# Altium PCB pcb.pcbdoc
Units mil, origin at the board's own origin, x right, y up, seen from the top; angles counter-clockwise.
Board outline 3897.6 x 2795.3 mil, 2 copper layers (Top Layer, Bottom Layer), stack 65.792 mil thick; 61 components, 75 nets, 253 pads, 287 vias.
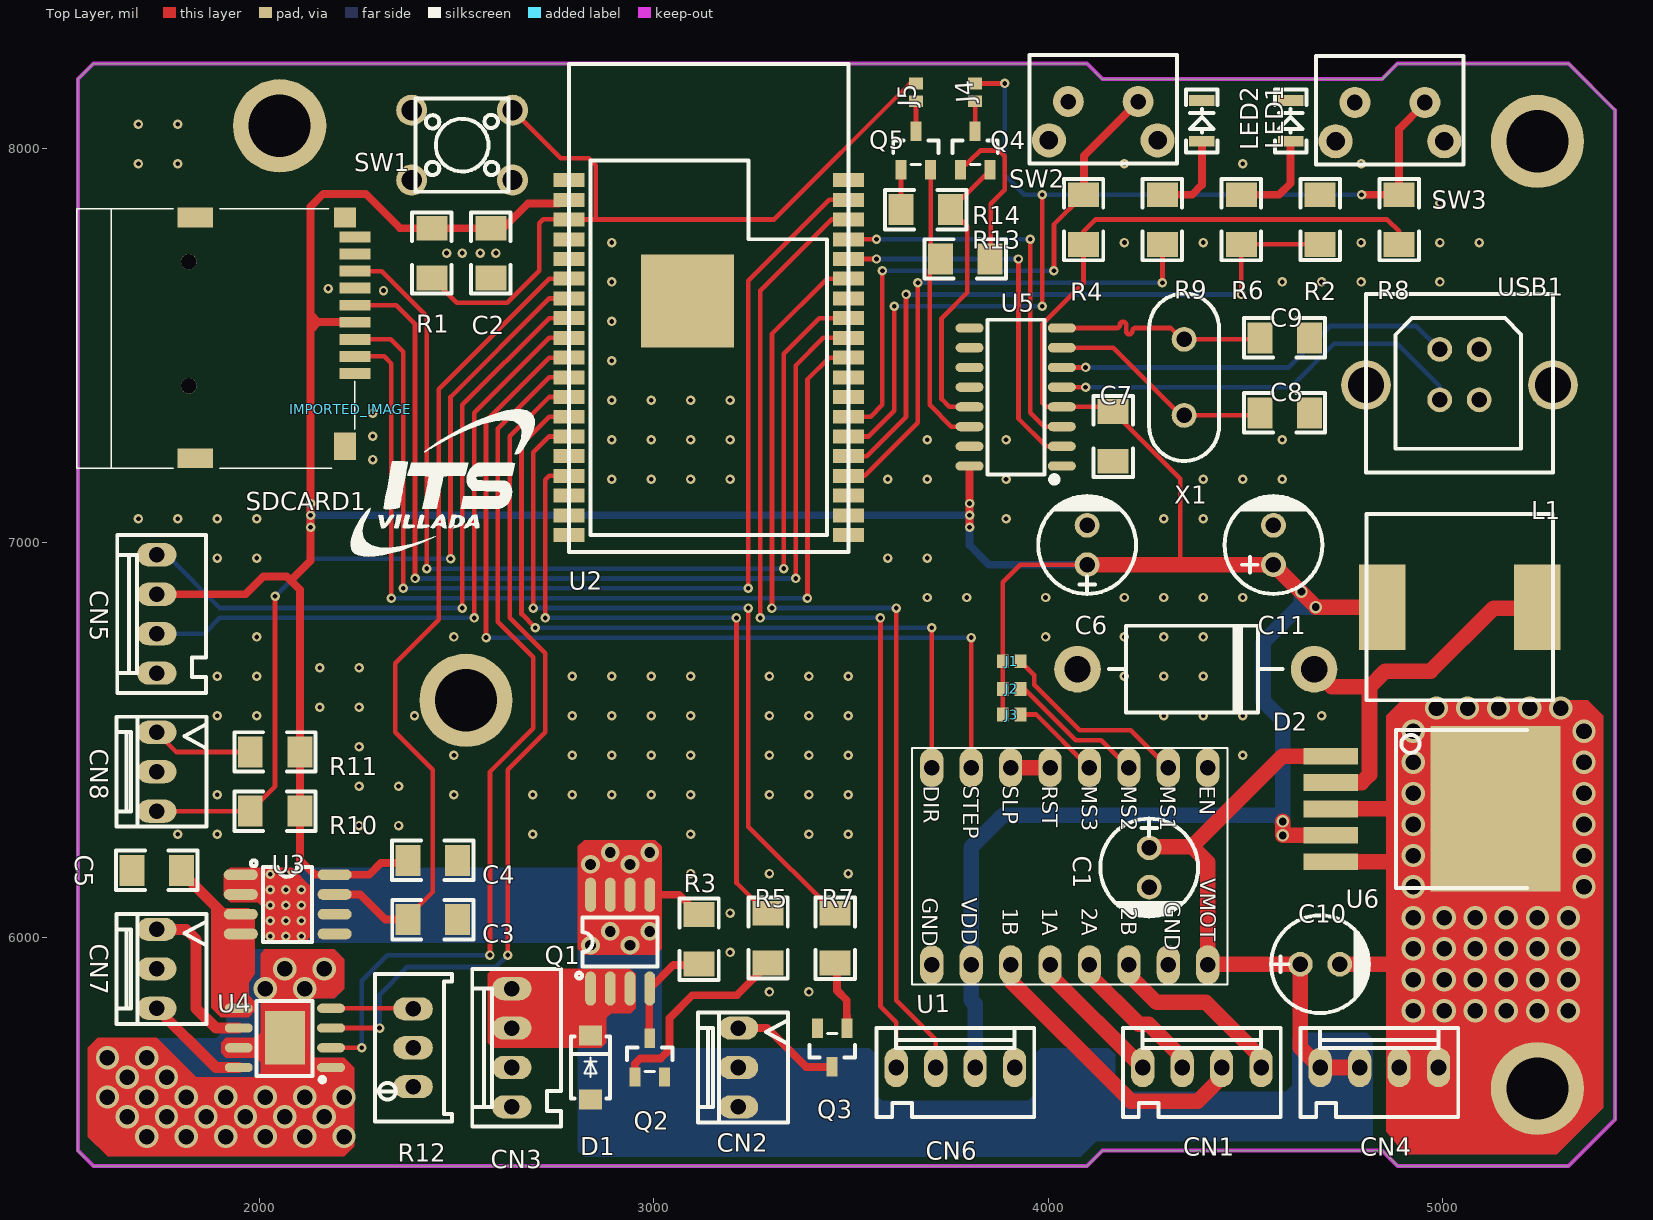
[diagram p0: Top Layer view]
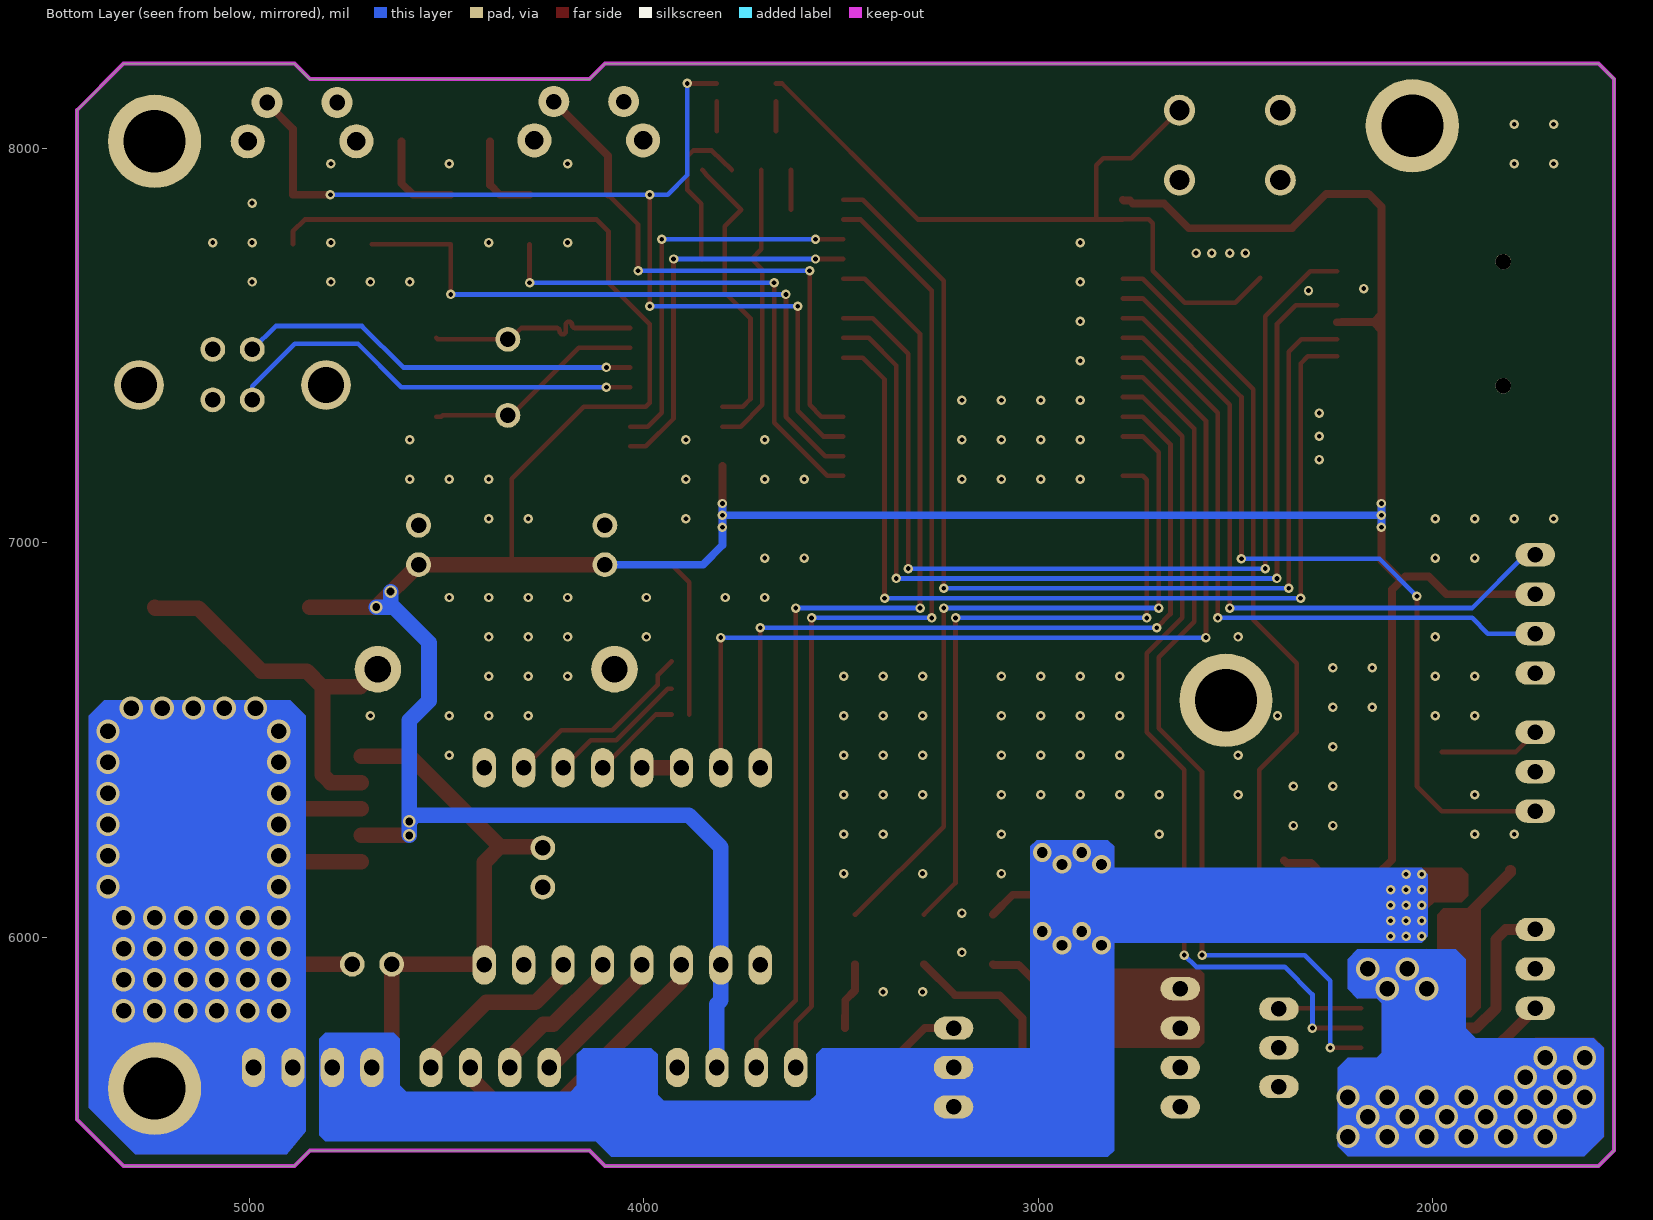
[diagram p1: Bottom Layer view, seen from below]

## Layer stack, top to bottom
Top Solder: solder mask 0.4, Solder Resist, Dk 3.5
Top Layer: signal copper 1.4
Dielectric1: dielectric 62.9921, FR-4, Dk 4.8
Bottom Layer: signal copper 1.4
Bottom Solder: solder mask 0.4, Solder Resist, Dk 3.5

## Board outline
1578.74,5419.13 1539.37,5458.5 1539.37,8175.03 1578.77,8214.43 4098.47,8214.43 4137.77,8175.03 4846.47,8175.03 4885.87,8214.43 5318.87,8214.43 5436.97,8096.33 5436.97,5537.23 5318.87,5419.13 4885.87,5419.13 4846.47,5458.53 4137.77,5458.53 4098.47,5419.13

## Design rules (kind name [scope] priority, off if disabled: settings)
Clearance [All] p1: gap=10 ignorepadtopadclearanceinfootprint=FALSE except(0: Arc-Hole Track-Hole SMDPad-Hole THPad-Hole Via-Hole Fill-Hole Poly-Hole Region-Hole Text-Hole)
PolygonConnect [All] p1: connectstyle=Relief reliefconductorwidth=10 reliefentries=4 polygonreliefangle="90 Angle" airgapwidth=10
RoutingVias [All] p1: holewidth=28 width=50 viastyle="Through Hole" minholewidth=28 minwidth=50 maxholewidth=28 maxwidth=50
SolderMaskExpansion [All] p1: expansion=4
Width [All] p1: maxlimit=10 minlimit=10 preferedwidth=10
30 further rules are at their usual default settings.

## Components (designator, comment, footprint, x,y, rotation, side; value= is the part's Value field where it differs from the comment)
C1 "100uF" CAP-D6.3XF2.5 4255.87,6176.23 r270 top
C2 "100nF" 1206 2586.67,7734.13 r90 top
C3 "1nF" 1206 2439.37,6044.13 r0 top
C4 "100nF" 1206 2439.37,6194.13 r180 top
C5 "100nF" 1206 1739.37,6169.13 r0 top
C6 "100uF" CAP-D6.3XF2.5 4098.47,6993.93 r90 top
C7 "100nF" 1206 4164.37,7269.13 r90 top
C8 "22pF" 1206 4599.37,7329.13 r180 top
C9 "22pF" 1206 4599.37,7519.13 r180 top
C10 "100uF" CAP-D6.3XF2.5 4688.97,5930.93 r0 top
C11 "470uF" CAP-TH_BD6.3-P2.50-D1.0-L-FD 4570.87,6993.93 r90 top
CN1 "A2543WV-4P" PH-4P-2.54 4389.37,5669.13 r0 top
CN2 "22041031" 22041031 3214.37,5669.13 r90 top
CN3 "A2543WV-4P" PH-4P-2.54 2639.37,5719.13 r90 top
CN4 "A2543WV-4P" PH-4P-2.54 4839.37,5669.13 r0 top
CN5 "A2543WV-4P" PH-4P-2.54 1739.37,6819.13 r90 top
CN6 "A2543WV-4P" PH-4P-2.54 3764.37,5669.13 r0 top
CN7 "22041031" 22041031 1739.37,5919.13 r90 top
CN8 "22041031" 22041031 1739.37,6419.13 r90 top
D1 "M7_C95872" DO-214AC_2PIN-L5.66-W2.80-R 2839.37,5669.13 r270 top
D2 "1N5820G" DO-201AD 4374.02,6678.98 r270 top
IMPORTED_IMAGE "Comment" IMPORTED_IMAGE 2230.83,7338.43 r0 top
J1 "jumper_smd" JMP 3929.37,6699.13 r180 top
J2 "jumper_smd" JMP 3929.37,6629.13 r180 top
J3 "jumper_smd" JMP 3929.37,6564.13 r180 top
J4 "jumper_smd" JMP 3814.37,8119.13 r90 top
J5 "jumper_smd" JMP 3664.37,8119.13 r90 top
L1 "150uH" L-SMD-12X12X8MM 5043.31,6836.46 r180 top
LED1 "TJ-S3216SW9TGLC2R-A5" LED-1206 4614.37,8069.13 r90 top
LED2 "TJ-S3216SW9TGLC2R-A5" LED-1206 4389.37,8069.13 r90 top
Q1 "IRF7416TRPBF" SOIC-8_150MIL#1 2914.37,5988.13 r90 top
Q2 "S9014" SOT-23(SOT-23-3) 2989.37,5694.13 r0 top
Q3 "S8050" SOT-23(SOT-23-3) 3451.97,5719.93 r180 top
Q4 "S9014" SOT-23(SOT-23-3) 3814.37,7994.13 r0 top
Q5 "S9014" SOT-23(SOT-23-3) 3664.37,7994.13 r0 top
R1 "10K" 1206 2436.97,7734.13 r90 top
R2 "10K" 1206 4689.37,7819.13 r90 top
R3 "10K" 1206 3114.37,5994.13 r90 top
R4 "10K" 1206 4089.37,7819.13 r270 top
R5 "1K" 1206 3289.37,5997.12 r90 top
R6 "330" 1206 4489.37,7819.13 r270 top
R7 "1K" 1206 3459.37,5997.12 r270 top
R8 "10K" 1206 4889.37,7819.13 r270 top
R9 "330" 1206 4289.37,7819.13 r270 top
R10 "10K" 1206 2039.37,6319.13 r0 top
R11 "1K" 1206 2039.37,6469.13 r0 top
R12 "50K" RES-ADJ-TH_3PIN-V-L9.50-W4.85-PITCH2.50 2389.37,5719.14 r180 top
R13 "10K" 1206 3789.37,7719.13 r0 top
R14 "10K" 1206 3689.37,7844.13 r180 top
SDCARD1 "TF-01A" TF-01A 2039.37,7519.1 r270 top
SW1 "TSA061G90-250" KEY-TOUCH-DIP-6.0*6.0*H 2513.77,8007.73 r0 top
SW2 "PTS645VL39-2LFS" KEY-7.0*7.0 4139.37,8069.13 r0 top
SW3 "PTS645VL39-2LFS" KEY-7.0*7.0 4866.17,8066.73 r0 top
U1 "A4988" "A4988 DRIVER MOTOR" 4404.37,6429.13 r270 top
U2 "ESP32-WROVER" ESP32-WROVER 3139.37,7469.13 r0 top
U3 "ACS722LLCTR-05AB-T" SOIC-8_150MIL#2 1977.57,6157.83 r0 top
U4 "DRV8871DDAR" SO-8_EP 2064.37,5744.13 r180 top
U5 "CH340G" SOIC-16_150MIL 3917.37,7369.13 r90 top
U6 "LM2576SX-3.3/NOPB" TO-263-5 4925.17,6324.63 r180 top
USB1 "USB-BType interface female 180°" USB-B-1 5042.51,7425.98 r180 top
X1 "12MHz" OSC-49S-1 4344.37,7419.13 r0 top

## Footprints (in the part's own frame and the unit in brackets; to place one, negate y for a bottom-side part, rotate by r counter-clockwise, add the part's x,y. Pads: shape width x height; smd on the part's side, far side on the other; paste and mask are expansions set on the pad)
1206 [mil]
  rect 63x78.74 smd: 1(-62.99,0) 2(62.99,0)
  silkscreen extent -103,-50 103,50
22041031 [mm]
  oval 1.5x2.54 hole 1: 1(2.54,0) 2(0,0) 3(-2.54,0)
  silkscreen extent -3.54,-3.2 3.54,2.6
"A4988 DRIVER MOTOR" [mm]
  oval 2.54x1.5 hole 1: 1(0,0) 2(0,-2.54) 3(0,-5.08) 4(0,-7.62) 5(0,-10.16) 6(0,-12.7) 7(0,-15.24) 8(0,-17.78) 9(12.7,-17.78) 10(12.7,-15.24) 11(12.7,-12.7) 12(12.7,-10.16) 13(12.7,-7.62) 14(12.7,-5.08) 15(12.7,-2.54) 16(12.7,0)
  silkscreen extent -1.27,-19.05 13.97,1.27
CAP-D6.3XF2.5 [mm]
  round 1.6 hole 1: 1(-1.27,0) 2(1.27,0)
  silkscreen extent -3.15,-3.15 3.17,3.15
CAP-TH_BD6.3-P2.50-D1.0-L-FD [mm]
  round 1.6 hole 1: 1(-1.27,0) 2(1.27,0)
  silkscreen extent -3.15,-3.15 3.17,3.15
DO-201AD [mm]
  round 3 hole 1.7: 1(0,-7.62) 2(0,7.62)
  silkscreen extent -2.8,-5.6 2.8,5.6
DO-214AC_2PIN-L5.66-W2.80-R [mil]
  rect 50x57.9 smd: 1(81,0) 2(-81,0)
  silkscreen extent -79,-49 78,49
ESP32-WROVER [mm]
  rect 2x0.9 smd: 1(-9,11.43) 2(-9,10.16) 3(-9,8.89) 4(-9,7.62) 5(-9,6.35) 6(-9,5.08) 7(-9,3.81) 8(-9,2.54) 9(-9,1.27) 10(-9,0) 11(-9,-1.27) 12(-9,-2.54) 13(-9,-3.81) 14(-9,-5.08) 15(-9,-6.35) 16(-9,-7.62) 17(-9,-8.89) 18(-9,-10.16) 19(-9,-11.43) 20(9,-11.43) 21(9,-10.16) 22(9,-8.89) 23(9,-7.62) 24(9,-6.35) 25(9,-5.08) 26(9,-3.81) 27(9,-2.54) 28(9,-1.27) 29(9,0) 30(9,1.27) 31(9,2.54) 32(9,3.81) 33(9,5.08) 34(9,6.35) 35(9,7.62) 36(9,8.89) 37(9,10.16) 38(9,11.43)
  rect 6x6 smd: 39(-1.38,3.64)
  silkscreen extent -9,-12.53 9,18.9
IMPORTED_IMAGE [mil]
  silkscreen extent 0,-374 467,0
JMP [mil]
  rect 30x35 smd: 1(0,0) 2(45,0)
KEY-7.0*7.0 [mm]
  round 2 hole 1: 1(-2.25,1.25) 2(2.25,1.25)
  round 2.2 hole 1.199: 3(-3.5,-1.25) 4(3.5,-1.25)
  silkscreen extent -4.75,-2.75 4.75,4.25
KEY-TOUCH-DIP-6.0*6.0*H [mm]
  round 2 hole 1.3: 1(-3.25,2.25) 2(3.25,2.25) 3(-3.25,-2.25) 4(3.25,-2.25)
  silkscreen extent -3,-3 3,3
L-SMD-12X12X8MM [mm]
  rect 3x5.5 smd: 1(-5,0) 2(5,0)
  silkscreen extent -6,-6 6,6
LED-1206 [mm]
  rect 0.68x1.65 smd: 1(-1.315,0) 2(1.315,0)
  silkscreen extent -2.03,-1.02 2.03,1.02
OSC-49S-1 [mm]
  round 1.6 hole 1: 1(0,2.45) 2(0,-2.45)
  silkscreen extent -2.25,-5.39 2.25,5.39
PH-4P-2.54 [mm]
  oval 1.5x2.54 hole 1: 1(3.81,0) 2(1.27,0) 3(-1.27,0) 4(-3.81,0)
  silkscreen extent -5.08,-3.17 5.08,2.54
RES-ADJ-TH_3PIN-V-L9.50-W4.85-PITCH2.50 [mm]
  oval 2.54x1.5 hole 1: 1(0,2.5) 2(0,0) 3(0,-2.5)
  silkscreen extent -2.5,-4.76 2.45,4.75
SO-8_EP [mm]
  oval 1.8x0.6 smd: 1(-2.972,1.905) 2(-2.972,0.635) 3(-2.972,-0.635) 4(-2.972,-1.905) 5(2.972,-1.905) 6(2.972,-0.635) 7(2.972,0.635) 8(2.972,1.905)
  rect 2.56x3.45 smd: 9(0,0)
  silkscreen extent -2.56,-2.39 1.83,2.84
SOIC-8_150MIL#1 [mm]
  oval 2.2x0.7 smd: 1(-3.023,1.905) 2(-3.023,0.635) 3(-3.023,-0.635) 4(-3.023,-1.905) 5(3.023,-1.905) 6(3.023,-0.635) 7(3.023,0.635) 8(3.023,1.905)
  silkscreen extent -2.37,-2.41 1.55,2.83
SOIC-8_150MIL#2 [mm]
  oval 2.2x0.7 smd: 1(-0.635,0) 2(-0.635,-1.27) 3(-0.635,-2.54) 4(-0.635,-3.81) 5(5.41,-3.81) 6(5.41,-2.54) 7(5.41,-1.27) 8(5.41,0)
  silkscreen extent 0.01,-4.32 3.94,0.93
SOIC-16_150MIL [mm]
  oval 0.6x1.8 smd: 1(-4.445,-2.972) 2(-3.175,-2.972) 3(-1.905,-2.972) 4(-0.635,-2.972) 5(0.635,-2.972) 6(1.905,-2.972) 7(3.175,-2.972) 8(4.445,-2.972) 9(4.445,2.972) 10(3.175,2.972) 11(1.905,2.972) 12(0.635,2.972) 13(-0.635,2.972) 14(-1.905,2.972) 15(-3.175,2.972) 16(-4.445,2.972)
  silkscreen extent -5.51,-2.69 4.98,1.83
SOT-23(SOT-23-3) [mm]
  rect 0.7x1.25 smd: 1(-0.95,-1.25) 2(0.95,-1.25) 3(0,1.25)
  silkscreen extent -1.46,-0.9 1.46,0.65
TF-01A [mm]
  rect 0.7x2 smd: 1(2.292,5.145) 2(1.192,5.143) 3(0.096,5.145) 4(-1.004,5.145) 5(-2.103,5.145) 6(-3.201,5.145) 7(-4.297,5.145) 8(-5.395,5.145) 9(-6.499,5.145)
  rect 1.27x1.397 smd: 10(-7.747,4.507)
  rect 1.27x2.286 smd: 11(-7.747,-5.145) 12(7.747,-5.145)
  rect 1.778x1.397 smd: 13(6.985,4.507)
  round 1 hole 1 unplated: ""(-4.915,-5.557) ""(3.084,-5.554)
  silkscreen extent -8.31,-12.76 8.39,5.14
TO-263-5 [mil]
  rect 137.79x42.1 smd: 1(209,-134) 2(209,-67) 3(209,0) 4(209,67) 5(209,134)
  rect 329.92x419.68 smd: 6(-209,0)
  silkscreen extent -289,-200 44,200
USB-B-1 [mm]
  round 3.2 hole 2.3: 0(-6.02,0.674) 0(6.02,0.674)
  round 1.6 hole 1: 1(-1.27,-1.625) 2(1.27,-1.625) 3(1.27,1.625) 4(-1.27,1.625)
  silkscreen extent -6.02,-5.19 6.02,6.3

## Free pads (board coordinates)
  round 236.22 hole 157.48: 1(2051.18,8056.92) 1(2523.62,6600.23) 1(5240.16,5615.98) 1(5240.16,8017.55)

## Via types
v1: diameter 24.02, hole 12.01, Top Layer to Bottom Layer, 186 vias
v2: diameter 59.06, hole 39.37, Top Layer to Bottom Layer, 68 vias
v3: diameter 24, hole 12, Top Layer to Bottom Layer, 21 vias
v4: diameter 47.24, hole 27.56, Top Layer to Bottom Layer, 8 vias
v5: diameter 31.5, hole 19.69, Top Layer to Bottom Layer, 4 vias

## Nets (pads, with @x,y where several pads share a name; then routed paths per layer and width w, separated by ;. In a path a pad name is that pad's centre, name@x,y a point inside that pad or via, vN(x,y) a via of type N, cw(c..) or ccw(c..) an arc to the next point about the centre after c; other vN are vias at no path point)
3.3V: C2.2 C4.2 C6.1 C7.2 C11.1 CN5.2 CN6.2 J1.2 J2.2 J3.2 L1.2 R1.2 R4.2 R8.2 R10.2 R11.2 SDCARD1.4 U1.10 U2.2 U3.8 U5.4 U5.16 U6.4 | length 11166.6
  Top Layer w11.81: J3.2 J1.2 3884.37,6899.13 3929.37,6944.13 4079.37,6944.13 4079.57,6943.93 C6.1 ; 4334.9,6943.93 4334.9,7161.6 C7.2 4152.36,7344.13 U5.4 3994.37,7344.13 3984.37,7354.13 3984.37,7554.13 4089.37,7659.13 4089.37,7789.13 4119.37,7819.13 4859.37,7819.13 4889.37,7789.13 R8.2
  Top Layer w19.68: CN5.2 1964.37,6869.13 2009.37,6914.13 2069.37,6914.13 2102.37,6881.13 R11.2 R10.2 2102.37,6196.13 2140.67,6157.83 U3.8 2278.07,6157.83 2308.07,6187.83 2370.07,6187.83 C4.2 ; 2081.78,6901.72 2084.37,6904.31 2084.37,6909.13 2129.37,6954.13 v1(2129.37,7039.13) v1(2129.37,7069.13) v1(2129.37,7099.13) 2129.37,7539.13 ; SDCARD1.4@2241.94,7558.65 2229.85,7558.65 2229.37,7559.13 2149.37,7559.13 ; C2.2@2586.57,7797.13 2618.07,7797.13 2681.07,7860.03 2759.87,7860.03 2766.87,7867.13 2782.97,7867.13 U2.2@2785.07,7869.13 ; C2.2@2586.61,7797.08 R1.2 2356.42,7797.09 2269.37,7884.13 2162,7884.13 2129.37,7851.5 2129.37,7579.13 ; v1(3800.37,7039.13) v1(3800.37,7069.13) v1(3800.37,7099.13) U5.16 ; 2129.37,7539.13 2149.37,7559.13 ; 2129.37,7539.13 2129.37,7579.13 ; 2129.37,7579.13 2149.37,7559.13
  Top Layer w39.37: C6.1@4098.43,6943.93 C11.1 v5(4678.35,6836.45) L1.2 ; v5(4594.49,6293.15) v5(4594.49,6257.64) U6.4
  Bottom Layer w19.68: v1(2129.37,7039.13) v1(2129.37,7069.13) ; v1(2129.37,7099.13) v1(2129.37,7069.13) ; v1@3799.37,7069.13 v1(2129.37,7069.13) ; v1(3800.37,7099.13) v1(3800.37,7069.13) v1(3800.37,7039.13) 3800.37,6993.13 3849.57,6943.93 C6.1
  Bottom Layer w39.37: CN6.2 3814.37,5829.13 3804.37,5839.13 U1.10 3804.37,6227.43 3885.87,6308.93 4578.77,6308.93 v5@4594.47,6293.13 ; v5(4594.49,6257.64) 4594.37,6549.13 4544.37,6599.13 4544.37,6746.45 4634.37,6836.45 ; v5(4641.73,6875.82) 4641.73,6843.82 4634.37,6836.45 ; v5(4678.35,6836.45) 4634.37,6836.45
+12V: C1.1 C10.1 CN2.2 CN2.3 CN4.3 CN4.4 Q1.5 Q1.6 Q1.7 Q1.8 R3.2 U1.16 U3.1 U3.2 U6.1 | length 1636.9
  Top Layer w19.68: Q1.5 3064.36,6107.13 R3.2
  Top Layer w39.37: C1.1 4258.82,6229.13 4364.37,6229.13 ; U6.1 4593.88,6458.64 4364.37,6229.13 ; CN4.3 CN4.4 4639.37,5719.13 4639.37,5930.55 C10.1 4406.18,5930.94 U1.16 4404.37,6189.13 4364.37,6229.13
  other v1: 2027.56,6001.81 2066.93,6001.81 2106.3,6001.81 2027.56,6041.18 2066.93,6041.18 2106.3,6041.18 2027.56,6080.55 2066.93,6080.55 2106.3,6080.55 2027.56,6119.92 2066.93,6119.92 2106.3,6119.92 2027.56,6159.29 2066.93,6159.29
  other v4: 2839.37,5979.13 2939.37,5979.13 2889.37,6014.13 2989.37,6014.13 2839.37,6184.13 2939.37,6184.13 2889.37,6214.13 2989.37,6214.13
BOTON1: J4.2 R8.1 SW3.2 U2.25 | length 2654.3
  Top Layer w11.81: U2.25 3544.37,7269.13 3609.37,7334.13 v3(3609.37,7599.13) ; J4.2 v3(3889.37,8164.13) ; v3(3984.37,7599.13) v3(3984.37,7882.13)
  Top Layer w19.68: v3(4794.37,7882.13) R8.1 4889.37,8048.63 4949.37,8108.63 4949.37,8110.63 SW3.2
  Bottom Layer w11.81: v3(3609.37,7599.13) v3(3984.37,7599.13) ; v3(3889.37,8164.13) 3889.37,7932.13 3939.37,7882.13 v3(3984.37,7882.13) 4189.37,7882.13 v3(4794.37,7882.13)
BOTON2: R4.1 SW2.2 U2.26 | length 1390.8
  Top Layer w11.81: U2.26 3549.37,7319.13 3579.37,7349.13 v3(3579.37,7689.13) ; v3(4014.37,7689.13) 4014.37,7807.12 R4.1
  Top Layer w19.68: R4.1 4090.57,7883.33 4090.57,7980.93 SW2.2
  Bottom Layer w11.81: v3(3579.37,7689.13) v3(4014.37,7689.13)
C8_2: C8.2 U5.7 X1.2 | length 564.5
  Top Layer w11.81: U5.7 4164.37,7494.13 4335.87,7322.64 4339.37,7322.64 4509.37,7322.67 4512.91,7319.13 C8.2@4526.38,7319.13
C9_2: C9.2 U5.8 X1.1 | length 548
  Top Layer w11.81: U5.8 4173.82,7544.13 ccw(c4173.82,7552.01) 4181.7,7552.01 cw(c4189.57,7552.01) 4197.44,7552.01 4197.44,7544.13 4197.44,7536.26 ccw(c4205.32,7536.26) 4213.19,7536.26 cw(c4221.07,7536.26) 4221.07,7544.13 4310.83,7544.13 4339.37,7515.59 4522.84,7515.59 C9.2@4526.38,7519.13
C_1A: CN1.4 U1.12 | length 357.3
  Top Layer w39.37: U1.12 4004.37,5904.13 CN1.4
C_1B: CN1.2 U1.11 | length 751.2
  Top Layer w39.37: U1.11 3904.37,5889.13 4209.37,5584.13 4379.37,5584.13 4439.37,5644.13 CN1.2
C_2A: CN1.3 U1.13 | length 372
  Top Layer w39.37: U1.13 4104.37,5904.13 4229.37,5779.13 4254.37,5779.13 4339.37,5694.13 CN1.3
C_2B: CN1.1 U1.14 | length 472
  Top Layer w39.37: U1.14 4204.37,5904.13 4274.37,5834.13 4399.37,5834.13 4539.37,5694.13 CN1.1
CN2_1: CN2.1 Q3.3 | length 278.4
  Top Layer w19.68: CN2.1 3287.4,5769.13 3385.8,5670.73 Q3.3
COOLER: R7.1 U2.14 | length 1918.7
  Top Layer w11.81: v1(2694.37,6834.13) 2694.37,7229.13 2734.37,7269.13 U2.14@2785.07,7269.13 ; v1(3239.37,6834.13) 3239.37,6280.11 R7.1 3462.35,6057.13 R7.1@3464.37,6057.13
  Bottom Layer w11.81: v1(2694.37,6834.13) v1(3239.37,6834.13)
D1_2: CN3.1 CN3.2 D1.2 Q1.1 Q1.2 Q1.3
D+: U5.5 USB1.3 | length 1082.5
  Top Layer w11.81: U5.5 v3(4094.37,7394.13)
  Bottom Layer w11.81: v3(4094.37,7394.13) 4614.37,7394.13 4724.37,7504.13 4884.37,7504.13 4992.17,7396.33 4992.17,7362.33 USB1.3
D-: U5.6 USB1.2 | length 1026.1
  Top Layer w11.81: U5.6 v3(4094.37,7444.13)
  Bottom Layer w11.81: v3(4094.37,7444.13) 4609.37,7444.13 4714.37,7549.13 4933.32,7549.13 USB1.2
DC_A: U2.12 U4.3 | length 2158.2
  Top Layer w11.81: U4.3 v1(2304.37,5769.13) ; v1(2629.37,5954.13) 2629.37,6424.13 2724.37,6519.13 2724.37,6709.13 2724.37,6719.13 2634.37,6809.13 2634.37,7269.13 2734.37,7369.13 U2.12@2785.07,7369.13
  Bottom Layer w11.81: v1(2304.37,5769.13) 2304.37,5854.13 2374.37,5924.13 2599.37,5924.13 v1(2629.37,5954.13)
DC_B: U2.11 U4.2 | length 2252.3
  Top Layer w11.81: U4.2 v1(2259.37,5719.13) ; v1(2584.37,5954.13) 2584.37,6419.13 2694.37,6529.13 2694.37,6709.13 2604.37,6799.13 2604.37,7289.13 2734.37,7419.13 U2.11@2785.07,7419.13
  Bottom Layer w11.81: v1(2259.37,5719.13) 2259.37,5889.13 2324.37,5954.13 v1(2584.37,5954.13)
DC_CURRENT: C3.1 U2.6 U3.7 | length 2114.9
  Top Layer w11.81: C3.1 2376.37,6051.13 2439.37,6114.13 2439.37,6424.13 2344.37,6519.13 2344.37,6694.13 2454.37,6804.13 2454.37,7389.13 2734.37,7669.13 U2.6@2785.07,7669.13
  Top Layer w19.68: U3.7 2255.67,6107.83 2319.37,6044.13 C3.1
ENCODER_A: CN5.3 U2.9 | length 1661
  Top Layer w11.81: v1(2544.37,6809.13) 2544.37,7329.13 2734.37,7519.13 U2.9@2785.07,7519.13
  Bottom Layer w11.81: CN5.3 1859.37,6769.13 1899.37,6809.13 v1(2544.37,6809.13)
ENCODER_B: CN5.1 U2.8 | length 1707.7
  Top Layer w11.81: v1(2514.37,6834.13) 2514.37,7349.13 2734.37,7569.13 U2.8@2785.07,7569.13
  Bottom Layer w11.81: CN5.1 1764.37,6969.13 1899.37,6834.13 v1(2514.37,6834.13)
ESP_RX: U2.34 U5.2 | length 974.7
  Top Layer w11.81: U2.34 v3(3564.37,7719.13) ; v3(3924.37,7719.13) 3924.37,7314.13 3994.37,7244.13 U5.2
  Bottom Layer w11.81: v3(3564.37,7719.13) v3(3924.37,7719.13)
ESP_TX: U2.35 U5.3 | length 995.2
  Top Layer w11.81: U2.35 v3(3564.37,7769.13) ; v3(3954.37,7769.13) 3954.37,7329.13 3989.37,7294.13 U5.3
  Bottom Layer w11.81: v3(3564.37,7769.13) v3(3954.37,7769.13)
GND: C1.2 C2.1 C3.2 C4.1 C5.1 C6.2 C7.1 C8.1 C9.1 C10.2 C11.2 CN3.3 CN3.4 CN4.1 CN4.2 CN5.4 CN6.1 CN8.2 D1.1 D2.1 LED1.2 LED2.2 pad.1 Q2.2 Q3.2 R2.2 R12.1 R12.2 SDCARD1.6 SDCARD1.10 SDCARD1.11 SDCARD1.12 SDCARD1.13 SW1.3 SW2.1 SW2.3 SW2.4 SW3.1 SW3.3 SW3.4 U1.9 U1.15 U2.1 U2.15 U2.38 U2.39 U3.5 U3.6 U4.1 U4.7 U4.9 U5.1 U6.3 U6.5 U6.6 USB1.4 | length 512.4
  Top Layer w39.37: U6.5 4869.94,6190.64 4885.83,6206.54 ; U6.3 4885.82,6324.64 ; C10.2 4905.51,5930.94
  other v1: 3292.98,5860.83 3392.98,5860.83 3192.98,5960.83 3192.98,6060.83 3092.98,6160.83 3292.98,6160.83 3492.98,6160.83 1792.98,6260.83 1892.98,6260.83 2692.98,6260.83 3092.98,6260.83 3392.98,6260.83 3492.98,6260.83 2252.46,6282.49 2352.46,6282.49 1892.98,6360.83 2492.98,6360.83 2692.98,6360.83 2792.98,6360.83 2892.98,6360.83 2992.98,6360.83 3092.98,6360.83 3292.98,6360.83 3392.98,6360.83 3492.98,6360.83 2252.46,6382.49 2352.46,6382.49 2492.98,6460.83 2792.98,6460.83 2892.98,6460.83 2992.98,6460.83 3092.98,6460.83 3292.98,6460.83 3392.98,6460.83 3492.98,6460.83 4492.98,6460.83 2252.46,6482.49 1892.98,6560.83 1992.98,6560.83 2392.98,6560.83 2792.98,6560.83 2892.98,6560.83 2992.98,6560.83 3092.98,6560.83 3292.98,6560.83 3392.98,6560.83 3492.98,6560.83 4292.98,6560.83 4392.98,6560.83 4492.98,6560.83 4692.98,6560.83 2152.46,6582.49 2252.46,6582.49 1892.98,6660.83 1992.98,6660.83 2792.98,6660.83 2892.98,6660.83 2992.98,6660.83 3092.98,6660.83 3292.98,6660.83 3392.98,6660.83 3492.98,6660.83 4192.98,6660.83 4292.98,6660.83 4392.98,6660.83 2152.46,6682.49 2252.46,6682.49 1992.98,6760.83 2492.98,6760.83 3992.98,6760.83 4192.98,6760.83 4292.98,6760.83 4392.98,6760.83 3692.98,6860.83 3792.98,6860.83 3992.98,6860.83 4192.98,6860.83 4292.98,6860.83 4392.98,6860.83 4492.98,6860.83 1892.98,6960.83 1992.98,6960.83 3592.98,6960.83 3692.98,6960.83 1692.98,7060.83 1792.98,7060.83 1892.98,7060.83 1992.98,7060.83 3892.98,7060.83 4292.98,7060.83 4392.98,7060.83 2892.98,7160.83 2992.98,7160.83 3092.98,7160.83 3192.98,7160.83 3592.98,7160.83 3692.98,7160.83 3892.98,7160.83 4392.98,7160.83 4492.98,7160.83 4592.98,7160.83 2287.4,7210.47 2892.98,7260.83 2992.98,7260.83 3092.98,7260.83 3192.98,7260.83 3692.98,7260.83 3892.98,7260.83 4592.98,7260.83 2287.4,7269.53 2287.4,7328.58 2892.98,7360.83 2992.98,7360.83 3092.98,7360.83 3192.98,7360.83 2892.98,7460.83 2892.98,7560.83 2314.37,7639.13 2174.37,7644.13 2892.98,7660.83 4592.98,7660.83 4692.98,7660.83 4792.98,7660.83 4992.98,7660.83 2474.37,7734.13 2514.37,7734.13 2559.37,7734.13 2599.37,7734.13 2892.98,7760.83 4192.98,7760.83 4392.98,7760.83 4792.98,7760.83 4992.98,7760.83 5092.98,7760.83 4992.98,7860.83 1692.98,7960.83 1792.98,7960.83 4192.98,7960.83 4492.98,7960.83 4792.98,7960.83 1692.98,8060.83 1792.98,8060.83
  other v2: 1714.37,5494.13 1814.37,5494.13 1914.37,5494.13 2014.37,5494.13 2114.37,5494.13 2214.37,5494.13 1664.37,5544.13 1764.37,5544.13 1864.37,5544.13 1964.37,5544.13 2064.37,5544.13 2164.37,5544.13 1614.37,5594.13 1714.37,5594.13 1814.37,5594.13 1914.37,5594.13 2014.37,5594.13 2114.37,5594.13 2214.37,5594.13 1664.37,5644.13 1764.37,5644.13 1614.37,5694.13 1714.37,5694.13 4925.2,5812.83 5003.94,5812.83 5082.68,5812.83 5161.42,5812.83 5240.16,5812.83 5318.9,5812.83 2014.37,5869.13 2114.37,5869.13 4925.2,5891.57 5003.94,5891.57 5082.68,5891.57 5161.42,5891.57 5240.16,5891.57 5318.9,5891.57 2064.37,5919.13 2164.37,5919.13 4925.2,5970.31 5003.94,5970.31 5082.68,5970.31 5161.42,5970.31 5240.16,5970.31 5318.9,5970.31 4925.2,6049.05 5003.94,6049.05 5082.68,6049.05 5161.42,6049.05 5240.16,6049.05 5318.9,6049.05 4925.2,6127.79 5358.27,6127.79 4925.2,6206.53 5358.27,6206.53 4925.2,6285.27 5358.27,6285.27 4925.2,6364.01 5358.27,6364.01 4925.2,6442.75 5358.27,6442.75 4925.2,6521.49 5358.27,6521.49 4984.25,6580.55 5062.99,6580.55 5141.73,6580.55 5220.47,6580.55 5299.21,6580.55
I2C_SCL: CN6.4 U2.36 | length 2590.4
  Top Layer w11.81: v3(3269.37,6809.13) 3269.37,6894.13 3269.37,7639.13 3449.37,7819.13 U2.36 ; v3(3574.37,6809.13) 3574.37,6709.13 3574.37,5904.13 3574.37,5824.13 3614.37,5784.13 CN6.4
  Bottom Layer w11.81: v3(3269.37,6809.13) v3(3574.37,6809.13)
I2C_SDA: CN6.3 U2.33 | length 2468.7
  Top Layer w11.81: v3(3299.37,6834.13) 3299.37,6894.13 3299.37,7529.13 3439.37,7669.13 U2.33 ; v3(3614.37,6834.13) 3614.37,6709.13 3614.37,5904.13 3614.37,5839.13 3714.37,5739.13 CN6.3
  Bottom Layer w11.81: v3(3299.37,6834.13) v3(3614.37,6834.13)
L1_1: D2.2 L1.1 U6.2 | length 997.5
  Top Layer w39.37: D2.2 4718.86,6634.13 4814.37,6634.13 ; U6.2 4794.37,6391.64 4814.37,6411.64 4814.37,6634.13 ; L1.1 5237.84,6834.13 5129.37,6834.13 4969.37,6674.13 4854.37,6674.13 4814.37,6634.13
LED1: R2.1 R6.2 U2.24 | length 1674.1
  Top Layer w11.81: U2.24 3539.37,7219.13 3639.37,7319.13 v3(3639.37,7629.13) ; v3(4489.37,7629.13) R6.2 R2.1
  Bottom Layer w11.81: v3(3639.37,7629.13) v3(4489.37,7629.13)
LED1_1: LED1.1 R6.1 | length 242.8
  Top Layer w19.68: R6.1 4585.06,7882.12 4614.37,7911.43 LED1.1@4614.37,8017.13
LED2: R9.2 U2.23 | length 1303.6
  Top Layer w11.81: U2.23 3534.37,7169.13 3669.37,7304.13 v3(3669.37,7659.13) ; v3(4289.37,7659.13) R9.2
  Bottom Layer w11.81: v3(3669.37,7659.13) v3(4289.37,7659.13)
LED2_1: LED2.1 R9.1 | length 220.7
  Top Layer w19.68: R9.1 4364.56,7882.12 4389.37,7906.93 LED2.1@4389.37,8017.34
Q1_4: Q1.4 Q2.3 R3.1 | length 276.5
  Top Layer w19.68: Q2.3@2988.17,5741.93 Q1.4@2988.17,5867.73 ; Q1.4 3049.37,5929.13 3112.36,5929.13 R3.1
Q2_1: Q2.1 R5.1 | length 522.6
  Top Layer w19.68: Q2.1 2951.97,5678.93 2965.17,5692.13 3017.07,5692.13 3039.37,5714.43 3039.37,5794.13 3097.47,5852.23 3210.47,5852.23 R5.1@3289.37,5931.13
Q3_1: Q3.1 R7.2 | length 172.3
  Top Layer w19.68: R7.2@3464.37,5931.13 3464.37,5864.23 3489.17,5839.43 Q3.1
Q4_1: Q4.1 R13.2 | length 413.9
  Top Layer w11.81: Q4.1 3827.77,7994.13 3874.37,7994.13 3889.37,7979.13 3889.37,7894.13 3854.37,7859.13 3854.37,7721.13 R13.2
Q4_3: J4.1 Q4.3 | length 75.8
  Top Layer w11.81: Q4.3 J4.1
Q5_3: J5.1 Q5.3 | length 75.8
  Top Layer w11.81: Q5.3 J5.1
R11_1: CN8.1 R11.1 | length 257.7
  Top Layer w11.81: CN8.1 1789.37,6469.13 R11.1
R14_2: Q5.1 R14.2 | length 101
  Top Layer w11.81: R14.2 3626.38,7944.34 Q5.1
RESET: J5.2 R1.1 SW1.2 U2.3 | length 1960.2
  Top Layer w11.81: R1.1 2499.97,7608.13 2628.37,7608.13 2709.67,7689.43 2709.67,7809.83 2719.47,7819.73 2785.07,7819.13 3304.37,7819.13 3649.37,8164.13 J5.2 ; SW1.2 2763.89,7974.13 2834.37,7974.13 2852.2,7956.31 2852.2,7819.13
S$10: 
S$12: 
S$17: 
S$19: 
S$21: 
S$23: 
S$34: 
S$56: 
S$58: 
S$61: 
S$65: 
S$70: 
S$72: 
S$74: 
S$216: 
S$218: 
S$222: 
S$232: 
SD_CS: SDCARD1.2 U2.29 | length 2432.1
  Top Layer w11.81: SDCARD1.2 2316.27,7472.23 2334.37,7454.13 2334.37,7384.13 v1(2334.37,6859.13) ; v1(3389.37,6859.13) 3389.37,6959.13 3389.37,7414.13 3444.37,7469.13 U2.29
  Bottom Layer w11.81: v1(2334.37,6859.13) v1(3389.37,6859.13)
SD_DI: SDCARD1.3 U2.37 | length 2729.5
  Top Layer w11.81: SDCARD1.3@2241.97,7515.33 2333.17,7515.33 2364.37,7484.13 2364.37,7384.13 v1(2364.37,6884.13) ; v1(3239.37,6884.13) 3239.37,7664.13 3444.37,7869.13 U2.37
  Bottom Layer w11.81: v1(2364.37,6884.13) v1(3239.37,6884.13)
SD_DO: SDCARD1.7 U2.31 | length 2521.3
  Top Layer w11.81: SDCARD1.7@2241.97,7688.33 2310.17,7688.33 2424.37,7574.13 2424.37,7384.13 v1(2424.37,6934.13) ; v1(3329.37,6934.13) 3329.37,7479.13 3419.37,7569.13 U2.31
  Bottom Layer w11.81: v1(2424.37,6934.13) v1(3329.37,6934.13)
SD_SCLK: SDCARD1.5 U2.30 | length 2485.5
  Top Layer w11.81: SDCARD1.5@2241.97,7601.93 2346.57,7601.93 2394.37,7554.13 2394.37,7384.13 v1(2394.37,6909.13) ; v1(3359.37,6909.13) 3359.37,7449.13 3429.37,7519.13 U2.30
  Bottom Layer w11.81: v1(2394.37,6909.13) v1(3359.37,6909.13)
SENS_HOJA: CN8.3 R10.1 U2.7 | length 2106.7
  Top Layer w11.81: CN8.3 R10.1 2039.37,6382.12 v1(2039.37,6864.13) ; v1(2484.37,6959.13) 2484.37,7369.13 2734.37,7619.13 U2.7@2785.07,7619.13
  Bottom Layer w11.81: v1(2039.37,6864.13) 2134.37,6959.13 2199.37,6959.13 v1(2484.37,6959.13)
SOLENOIDE: R5.2 U2.16 | length 1685
  Top Layer w11.81: v1(2724.37,6809.13) 2724.37,7159.13 2734.37,7169.13 U2.16@2785.07,7169.13 ; v1(3209.37,6809.13) 3209.37,6137.12 R5.2@3289.37,6057.12
  Bottom Layer w11.81: v1(2724.37,6809.13) v1(3209.37,6809.13)
ST_DIR: U1.8 U2.13 | length 1989.2
  Top Layer w11.81: v1(2699.37,6784.13) 2664.37,6819.13 2664.37,7249.13 2734.37,7319.13 U2.13@2785.07,7319.13 ; U1.8 v1(3704.37,6784.13)
  Bottom Layer w11.81: v1(2699.37,6784.13) v1(3704.37,6784.13)
ST_STEP: U1.7 U2.10 | length 2387
  Top Layer w11.81: v1(2574.37,6759.13) 2574.37,7309.13 2734.37,7469.13 U2.10@2785.07,7469.13 ; U1.7 v1(3804.37,6759.13)
  Bottom Layer w11.81: v1(2574.37,6759.13) v1(3804.37,6759.13)
U1_2: J1.1 U1.2 | length 501.5
  Top Layer w11.81: J1.1 3964.37,6664.13 3964.37,6639.13 4079.37,6524.13 4209.37,6524.13 U1.2
U1_3: J2.1 U1.3 | length 357.8
  Top Layer w11.81: J2.1 3939.37,6629.13 4069.37,6499.13 4134.37,6499.13 U1.3
U1_4: J3.1 U1.4 | length 230.9
  Top Layer w11.81: J3.1 3969.37,6564.13 U1.4
U1_5: U1.5 U1.6 | length 100
  Top Layer w39.37: U1.6 U1.5
U4_4: R12.3 U4.4 | length 208.7
  Top Layer w11.81: U4.4 2371.37,5819.13 2372.94,5817.56 R12.3
U4_5: C5.2 U3.3 U3.4 U4.5 | length 199.3
  Top Layer w27.56: C5.2 1802.37,6164.03 1908.57,6057.83 U3.3
U4_6: CN7.1 U4.6 | length 414.1
  Top Layer w27.56: CN7.1 1814.37,6019.13 1839.37,5994.13 1839.37,5819.13 1889.37,5769.13 U4.6
U4_8: CN7.3 U4.8 | length 270.1
  Top Layer w27.56: CN7.3 1889.37,5669.13 U4.8
U5_13: Q4.2 R14.1 U5.13 | length 745.6
  Top Layer w11.81: U5.13 3749.37,7344.13 3729.37,7364.13 3729.37,7569.13 3794.37,7634.13 3794.37,7802.13 R14.1 3842.36,7934.13 3842.36,7935.52 Q4.2
U5_14: Q5.2 R13.1 U5.14 | length 741
  Top Layer w11.81: Q5.2 3701.77,7743.74 R13.1 ; R13.1 3699.37,7692.13 3699.37,7349.13 3754.37,7294.13 U5.14
pads on no net: CN7.2 SDCARD1. SDCARD1.1 SDCARD1.8 SDCARD1.9 SW1.1 SW1.4 U1.1 U2.4 U2.5 U2.17 U2.18 U2.19 U2.20 U2.21 U2.22 U2.27 U2.28 U2.32 U5.9 U5.10 U5.11 U5.12 U5.15 USB1.0 USB1.1

## Other copper
Top Layer:
  region net GND: 2003.17,5957.25 2015.1,5970.08 2189.35,5969.13 2214.35,5944.13 2214.35,5869.13 2189.35,5844.13 2139.94,5844.1 2128.37,5832.25 2128.37,5707.05 2139.94,5694.1 2214.94,5694.1 2239.94,5669.1 2239.94,5469.1 2214.94,5444.1 1614.94,5444.1 1564.94,5494.1 1564.94,5719.1 1589.94,5744.1 1739.94,5744.1 1839.94,5644.1 1989.94,5644.1 2003.17,5656.97 2003.17,5682.01 1989.94,5694.1 1914.94,5694.1 1903.01,5707.05 1903.01,5732.09 1914.94,5744.1 1989.94,5744.1 2003.17,5757.13 2003.17,5957.25
  region net D1_2: 2578.5,5732.12 2578.5,5907.4 2591.02,5919.92 2939.37,5919.13 2954.09,5907.4 2954.09,5832.28 2954.09,5819.76 2941.57,5807.24 2891.5,5807.24 2878.98,5794.73 2878.98,5732.13 2866.46,5719.61 2591.02,5719.6 2578.5,5732.12
  region net +12V: 2807.09,5970.31 2822.84,5954.57 3003.94,5954.57 3019.69,5970.31 3019.69,6230.16 3003.94,6245.91 2822.84,6245.91 2807.09,6230.16 2807.09,5970.31
  region net GND: 4856.3,6560.86 4895.67,6600.23 5368.11,6600.23 5407.48,6560.86 5407.48,5566.77 5289.37,5448.66 4905.51,5448.66 4856.3,5507.71 4856.3,6560.86
  region net +12V: 1925.2,6088.43 1909.45,6104.17 1909.45,6159.29 1925.2,6175.04 2003.94,6175.04 2082.68,6175.04 2129.92,6127.8 2129.92,6001.81 2114.17,5986.06 2027.56,5986.06 2011.81,6001.81 2011.81,6072.68 1996.06,6088.43 1925.2,6088.43
  region net U4_5: 1877.95,6072.67 1972.44,6072.67 1988.19,6056.93 1988.19,5907.32 1972.44,5883.7 1972.44,5852.2 1988.19,5836.46 1988.19,5812.84 1972.44,5797.09 1901.58,5797.09 1877.95,5820.71 1877.95,6072.67
Bottom Layer:
  region net GND: 1615.77,5443.82 1565.77,5493.82 1565.77,5718.82 1590.77,5743.82 1890.77,5743.82 1915.77,5768.82 1915.77,5943.82 1940.77,5968.82 2190.18,5968.86 2215.18,5943.86 2215.18,5868.86 2190.18,5843.86 2141.12,5844.61 2128.61,5832.09 2128.61,5706.89 2141.12,5694.37 2215.18,5693.86 2240.18,5668.86 2240.18,5468.86 2215.18,5443.86 1615.77,5443.82
  region net GND: 4856.3,6560.86 4895.67,6600.23 5368.11,6600.23 5407.48,6560.86 5407.48,5566.77 5289.37,5448.66 4905.51,5448.66 4856.3,5507.72 4856.3,6560.86
  region net +12V: 2807.09,5458.5 2807.09,6230.16 2822.84,6245.91 3003.94,6245.91 3019.69,6230.16 3019.68,5442.75 2822.84,5442.76 2807.09,5458.5
  region net +12V: 3011.81,5718.34 3547.25,5718.34 3562.99,5702.6 3562.99,5600.24 3578.74,5584.49 3948.82,5584.49 3964.57,5600.24 3964.57,5702.6 3980.32,5718.35 4153.56,5718.34 4169.3,5702.59 4169.3,5623.85 4185.05,5608.11 4602.37,5608.1 4618.12,5623.85 4618.12,5741.96 4633.87,5757.71 4807.1,5757.71 4822.85,5741.96 4822.85,5497.87 4807.1,5482.12 4122.06,5482.12 4082.68,5442.75 3011.81,5442.75 3011.81,5718.34
  region net +12V: 2011.81,6001.81 2027.56,5986.06 2814.96,5986.06 2814.96,6175.04 2027.56,6175.04 2011.81,6159.29 2011.81,6001.81

## Silkscreen, mask and mechanical layers (free items; w line width, h text height)
Top Solder:
  region: 2004,5956.97 2015.93,5969.8 2190.18,5968.86 2215.18,5943.86 2215.18,5868.86 2190.18,5843.86 2140.77,5843.82 2129.2,5831.97 2129.2,5706.77 2140.77,5693.82 2215.77,5693.82 2240.77,5668.82 2240.77,5468.82 2215.77,5443.82 1615.77,5443.82 1565.77,5493.82 1565.77,5718.82 1590.77,5743.82 1740.77,5743.82 1840.77,5643.82 1990.77,5643.82 2004,5656.69 2004,5681.73 1990.77,5693.82 1915.77,5693.82 1903.84,5706.77 1903.84,5731.81 1915.77,5743.82 1990.77,5743.82 2004,5756.85 2004,5956.97
  region: 4856.3,6560.86 4895.67,6600.23 5368.11,6600.23 5407.48,6560.86 5407.48,5566.77 5289.37,5448.66 4905.51,5448.66 4856.3,5507.71 4856.3,6560.86
Bottom Solder:
  region: 1614.94,5444.1 1564.94,5494.1 1564.94,5719.1 1589.94,5744.1 1889.94,5744.1 1914.94,5769.1 1914.94,5944.1 1939.94,5969.1 2189.35,5969.13 2214.35,5944.13 2214.35,5869.13 2189.35,5844.13 2140.3,5844.89 2127.78,5832.36 2127.78,5707.17 2140.3,5694.65 2214.35,5694.13 2239.35,5669.13 2239.35,5469.13 2214.35,5444.13 1614.94,5444.1
  region: 4856.3,6560.86 4895.67,6600.23 5368.11,6600.23 5407.48,6560.86 5407.48,5566.77 5289.37,5448.66 4905.51,5448.66 4856.3,5507.72 4856.3,6560.86

## Text inside footprints (layer, text, board x,y; h text height)
U1: Top Overlay "MS1" at 4284.37,6384.13 h40 r270; Top Overlay "MS2" at 4184.37,6384.13 h40 r270; Top Overlay "MS3" at 4084.37,6384.13 h40 r270; Top Overlay "STEP" at 3784.37,6384.13 h40 r270; Top Overlay "DIR" at 3684.37,6384.13 h40 r270; Top Overlay "GND" at 3680.77,6099.13 h40 r270; Top Overlay "VDD" at 3780.77,6099.13 h40 r270; Top Overlay "1B" at 3884.37,6074.13 h40 r270; Top Overlay "1A" at 3984.37,6074.13 h40 r270; Top Overlay "2A" at 4084.37,6074.13 h40 r270; Top Overlay "2B" at 4184.37,6074.13 h40 r270; Top Overlay "GND" at 4295.77,6089.13 h40 r270; Top Overlay "VMOT" at 4385.77,6149.13 h40 r270; Top Overlay "EN" at 4384.37,6384.13 h40 r270; Top Overlay "RST" at 3984.37,6384.13 h40 r270; Top Overlay "SLP" at 3884.37,6384.13 h40 r270